# EAGLE board LED Button Press Game (EAGLE 7.6.0)

Size 73.58 x 63.39 mm. Coordinates in mm from the lower left corner, seen from the top.
Outline: 0,0 56.82,0 56.82,53.33 0,53.33 0,0
Copper layers (1*16): Top 0.035mm / dielectric 1.5mm / Bottom 0.035mm
Design rules "default": minimum track width 10mil, minimum drill 24mil, track to track 8mil, track to pad 8mil, pad to pad 8mil, via to via 8mil, smd to smd 8mil, copper to edge 40mil, drill to drill 8mil, minimum pad ring 10mil, minimum via ring 8mil, stop-mask expansion 4mil, vias tented up to drill 0mil, thermal gap 10mil

## Footprints (pad centres in the part's own frame; a part is rotated, then mirrored left to right if it is on the bottom)
LED5MM = drill 0.813 octagon: A -1.27,0; K 1.27,0
0207/10 = drill 0.813 octagon: 1 -5.08,0; 2 5.08,0
B25V = drill 0.813 long: A 2.54,0.635; E -2.54,0.635; S 0,0.635
TL1105 = drill 1 pad 1.676: 1 -2.25,3.25; 2 2.25,3.25; 3 -2.25,-3.25; 4 2.25,-3.25
1X16P-2.54-2.54-11.6-3.0-BLACK-MALE = drill 0.889 pad 1.651 square: 1 0,19.05 | drill 0.889 pad 1.651: 2 0,16.51; 3 0,13.97; 4 0,11.43; 5 0,8.89; 6 0,6.35; 7 0,3.81; 8 0,1.27; 9 0,-1.27; 10 0,-3.81; 11 0,-6.35; 12 0,-8.89; 13 0,-11.43; 14 0,-13.97; 15 0,-16.51; 16 0,-19.05
ARDUINO_UNO = drill 1.016 pad 1.88: 0 63.5,50.8; 1 60.96,50.8; 2 58.42,50.8; 3 55.88,50.8; 3.3V 35.56,2.54; 4 53.34,50.8; 5 50.8,50.8; 5V 38.1,2.54; 6 48.26,50.8; 7 45.72,50.8; 8 41.656,50.8; 9 39.116,50.8; 10 36.576,50.8; 11 34.036,50.8; 12 31.496,50.8; 13 28.956,50.8; A0 50.8,2.54; A1 53.34,2.54; A2 55.88,2.54; A3 58.42,2.54; A4 60.96,2.54; A5 63.5,2.54; AREF 23.876,50.8; GND 26.416,50.8; GND. 43.18,2.54; GND.. 40.64,2.54; I/OREF 30.48,2.54; N/C 27.94,2.54; RESET 33.02,2.54; SCL 18.796,50.8; SDA 21.336,50.8; VIN 45.72,2.54 | hole 3.2: 66.04,7.62; 66.04,35.56; 15.24,50.8; 13.97,2.54

## Placement (x,y rotation side)
DLED 1  [LED5MM]  5,86.28 0 top  (outside the outline)
DLED 2  [LED5MM]  5,98.98 0 top  (outside the outline)
RButton 1 GND  100k‎Ω  [0207/10]  5,35.48 0 top
RButton 2 GND  100k‎Ω  [0207/10]  5,48.18 0 top
RLCD LED PWR  220‎Ω  [0207/10]  5,149.78 0 top  (outside the outline)
RLED 1 PWR  220‎Ω  [0207/10]  5,60.88 0 top
RLED 1 PWR1  220‎Ω  [0207/10]  5,73.58 0 top  (outside the outline)
RpotLCD Contrast1  10k‎Ω  [B25V]  5,111.68 0 top  (outside the outline)
SButton 1  [TL1105]  5,124.38 0 top  (outside the outline)
SButton 2  [TL1105]  5,137.08 0 top  (outside the outline)
U3  [1X16P-2.54-2.54-11.6-3.0-BLACK-MALE]  5,22.78 0 top
UArduino 1  [ARDUINO_UNO]  5,10.08 0 top

## Library data of the parts
DLED 1 DLED 2 RButton 1 GND RButton 2 GND RLCD LED PWR RLED 1 PWR RLED 1 PWR1 RpotLCD Contrast1 SButton 1 SButton 2 U3 UArduino 1 = AUTODESK_CIRCUITS_BREADBOARD

## Nets
N$1: DLED 1.K DLED 2.K RButton 1 GND.2 RButton 2 GND.2 RpotLCD Contrast1.A U3.16 UArduino 1.GND..
N$2: RButton 1 GND.1 SButton 1.1
N$3: DLED 1.A RLED 1 PWR.2
N$4: RLED 1 PWR.1 UArduino 1.8
N$5: DLED 2.A RLED 1 PWR1.2
N$6: RLED 1 PWR1.1 UArduino 1.6
N$7: RpotLCD Contrast1.S U3.3
N$8: SButton 1.4
N$9: SButton 1.3 UArduino 1.9
N$10: SButton 2.4
N$11: SButton 2.3 UArduino 1.7
N$12: RButton 2 GND.1 SButton 2.1
N$13: U3.1 UArduino 1.GND
N$14: U3.4 UArduino 1.12
N$15: U3.6 UArduino 1.11
N$16: U3.14 UArduino 1.2
N$17: U3.13 UArduino 1.3
N$18: U3.12 UArduino 1.4
N$19: U3.11 UArduino 1.5
N$22: RLCD LED PWR.2 U3.15
N$23: RLCD LED PWR.1 RpotLCD Contrast1.E SButton 1.2 SButton 2.2 U3.2 UArduino 1.5V

## Tracks (layer width: path | path; a pad name or v marks a point on that pad's centre or on a via)
N$1  (6 unrouted)
N$2  (1 unrouted)
N$3  (1 unrouted)
N$4  (1 unrouted)
N$5  (1 unrouted)
N$6  (1 unrouted)
N$7  (1 unrouted)
N$9  (1 unrouted)
N$11  (1 unrouted)
N$12  (1 unrouted)
N$13  (1 unrouted)
N$14  (1 unrouted)
N$15  (1 unrouted)
N$16  (1 unrouted)
N$17  (1 unrouted)
N$18  (1 unrouted)
N$19  (1 unrouted)
N$22  (1 unrouted)
N$23  (5 unrouted)